# EAGLE board eeZeeRGB (EAGLE 6.4)
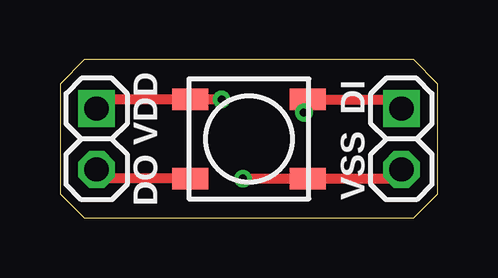
[diagram p0: board, top side]
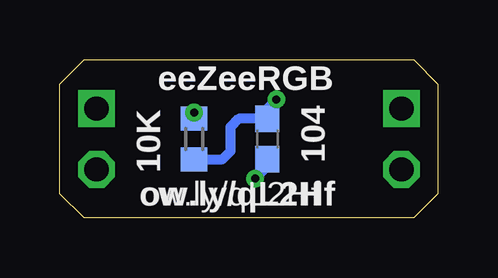
[diagram p1: board, bottom side, seen from below]

Size 15.75 x 6.6 mm. Coordinates in mm from the lower left corner, seen from the top.
Outline: 0,5.59 0,1.02 1.02,0 14.73,0 15.75,1.02 15.75,5.59 14.73,6.6 1.02,6.6 0,5.59
Copper layers (1*16): Top 0.035mm / dielectric 1.5mm / Bottom 0.035mm
Design rules "default": minimum track width 10mil, minimum drill 24mil, track to track 8mil, track to pad 8mil, pad to pad 8mil, via to via 8mil, smd to smd 8mil, copper to edge 40mil, drill to drill 8mil, minimum pad ring 10mil, minimum via ring 8mil, stop-mask expansion 4mil, vias tented up to drill 0mil, thermal gap 10mil

## Footprints (pad centres in the part's own frame; a part is rotated, then mirrored left to right if it is on the bottom)
C0603 = smd 1.1 x 1: 1 -0.85,0; 2 0.85,0
1X02-S = drill 1.016 square: 1 -1.27,0 | drill 1.016 octagon: 2 1.27,0
WS2812B = smd 1.5 x 0.9: DIN 2.45,1.65; DOUT -2.45,-1.65; VDD -2.45,1.65; VSS 2.45,-1.65
R0603 = smd 1 x 1.1: 1 -0.85,0; 2 0.85,0

## Placement (x,y rotation side)
C1  104  [C0603]  7.11,3.3 270 bottom
JP1  [1X02-S]  1.52,3.3 270 top
JP2  [1X02-S]  14.22,3.3 270 top
LED1  WS2812B  [WS2812B]  7.87,3.3 0 top
R1  10K  [R0603]  10.16,3.3 270 bottom

## Library data of the parts
C1 R1 = rcl
JP1 JP2 = pinhead-2
LED1 = bt_opto

## Nets
DIN: JP2.1 LED1.DIN R1.1
DOUT: JP1.2 LED1.DOUT
GND: C1.2 JP2.2 LED1.VSS
VDD: C1.1 JP1.1 LED1.VDD R1.2

## Tracks (layer width: path | path; a pad name or v marks a point on that pad's centre or on a via)
DIN  (via drill 0.33)
  Top 0.406: JP2.1 13.84,4.95 LED1.DIN v10.16,4.41
  Bottom 0.406: R1.1 v10.16,4.41
DOUT
  Top 0.406: LED1.DOUT 1.9,1.65 JP1.2
GND  (via drill 0.33)
  Top 0.406: JP2.2 13.84,1.65 LED1.VSS 10.2,1.65 v7.62,1.65
  Bottom 0.406: C1.2 7.11,2.16 v7.62,1.65
VDD  (via drill 0.33)
  Top 0.406: JP1.1 1.9,4.95 LED1.VDD v6.73,4.95
  Bottom 0.406: R1.2 8.98,2.45 8.64,2.79 8.64,3.81 8.29,4.15 C1.1 7.11,4.57 v6.73,4.95

## Text on the board
tPlace: VDD | DI | DO | VSS
bNames: eeZeeRGB | ow.ly/qL2Hf
tsilk: VDD | DI | DO | VSS
bsilk: 104 | eeZeeRGB | 10K | ow.ly/qL2Hf